# Altium PCB iForce-FPC.PcbDoc
Units mil, origin at the board's own origin, x right, y up, seen from the top; angles counter-clockwise.
Board outline 1062.99 x 661.42 mil, 2 copper layers (Top Layer, Bottom Layer); 1 components, 2 nets, 6 pads, 4 vias.
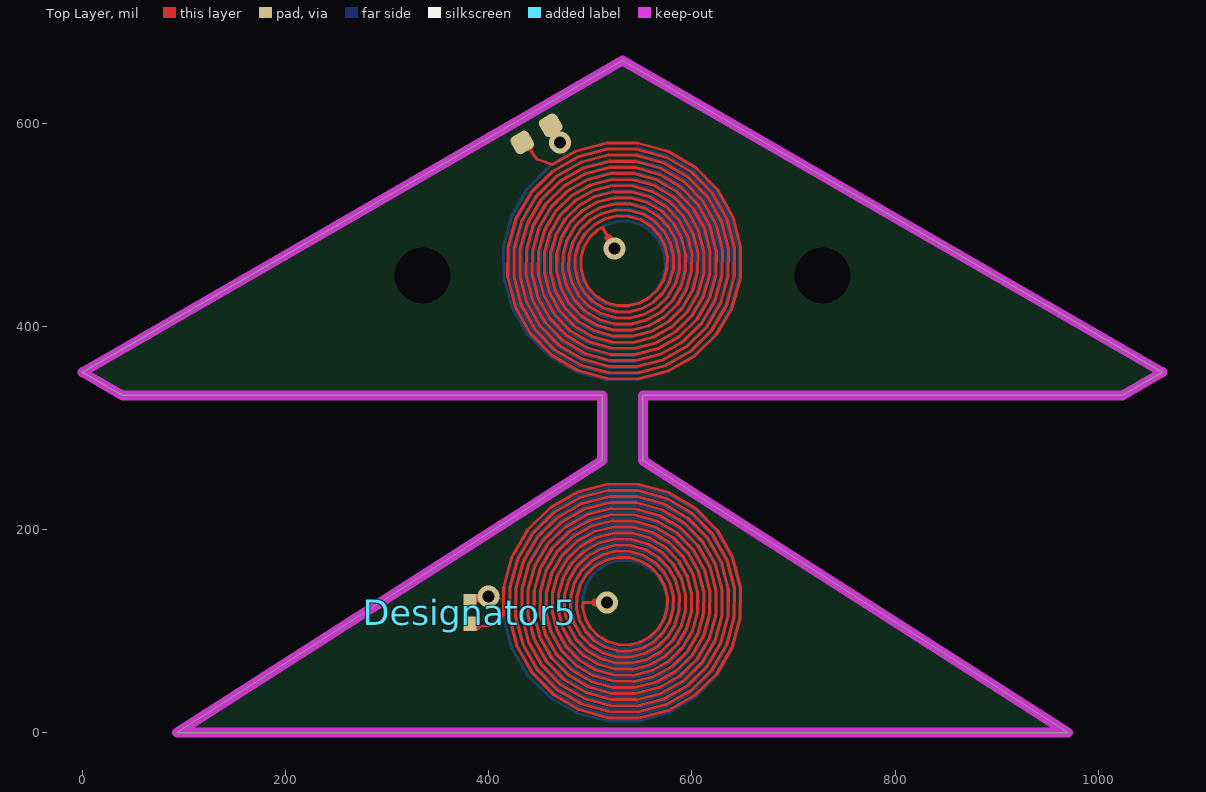
[diagram p0: Top Layer view]
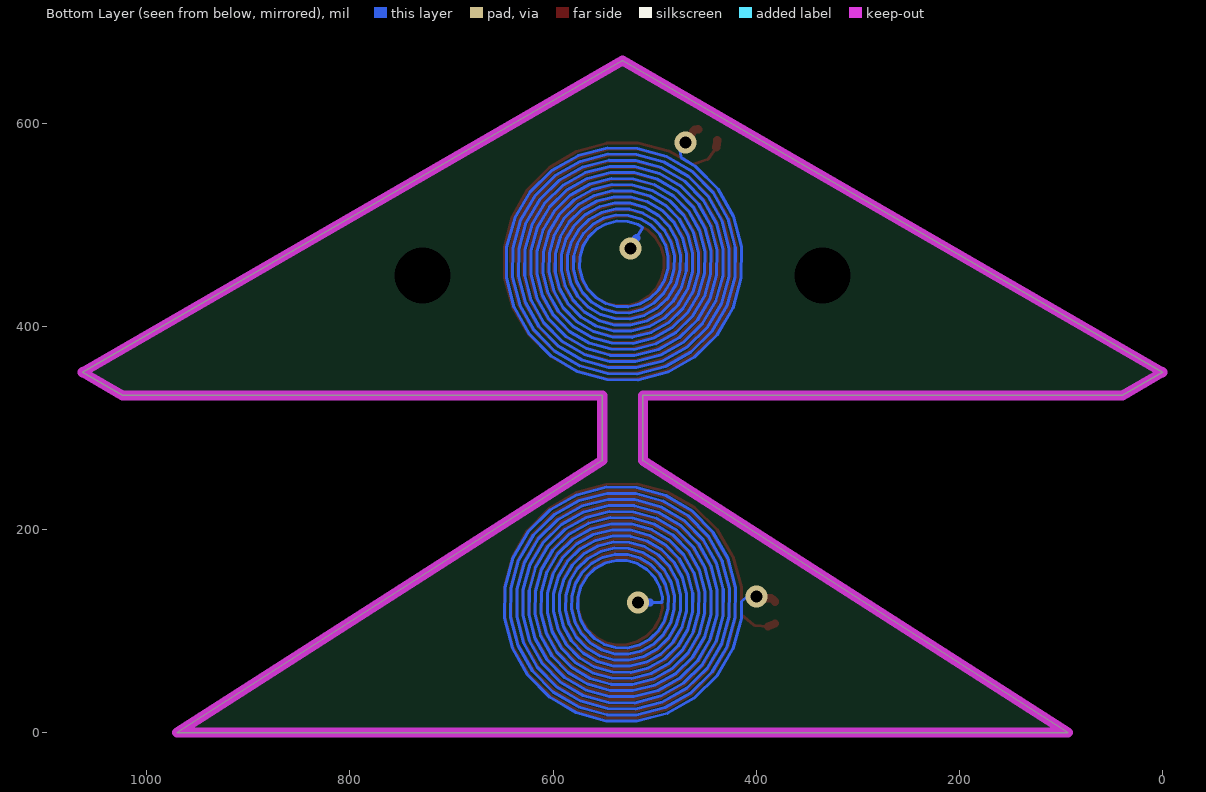
[diagram p1: Bottom Layer view, seen from below]

## Layer stack, top to bottom
Top Solder: solder mask 0.4, Solder Resist, Dk 3.5
Top Layer: signal copper 1.4
Dielectric 1: dielectric 12.6, FR-4, Dk 4.8
Bottom Layer: signal copper 1.4
Bottom Solder: solder mask 0.4, Solder Resist, Dk 3.5

## Board outline
93.44,0.25 511.75,267.97 511.75,332.08 39.62,332.08 0.25,354.81 531.75,661.67 1063.24,354.81 1023.87,332.08 551.74,332.08 551.74,267.97 970.05,0.25

## Design rules (kind name [scope] priority, off if disabled: settings)
Clearance [All] p1: gap=3 ignorepadtopadclearanceinfootprint=FALSE
PolygonConnect [All] p1: connectstyle=Relief reliefconductorwidth=10 reliefentries=4 polygonreliefangle="90 Angle" airgapwidth=10
RoutingVias [All] p1: holewidth=11.81 width=21.65 viastyle="Through Hole" minholewidth=11.81 minwidth=21.65 maxholewidth=28 maxwidth=50
SolderMaskExpansion [All] p1: expansion=4 istentingtop=FALSE
Width [All] p1: maxlimit=10 minlimit=3 preferedwidth=3
30 further rules are at their usual default settings.

## Components (designator, comment, footprint, x,y, rotation, side; value= is the part's Value field where it differs from the comment)
Designator5 "Comment" CAPC0603X33X15LL03T05 381.72,118.42 r90 top

## Footprints (in the part's own frame and the unit in brackets; to place one, negate y for a bottom-side part, rotate by r counter-clockwise, add the part's x,y. Pads: shape width x height; smd on the part's side, far side on the other; paste and mask are expansions set on the pad)
CAPC0603X33X15LL03T05 [mm] "Chip Capacitor, 2-Leads, Body 0.60x0.30mm, IPC High Density"
  rect 0.36x0.32 smd: 1(-0.28,0) 2(0.28,0)
  body extent -0.32,-0.17 0.32,0.17, height 0.33

## Free pads (board coordinates)
  rrect50% 19.68x19.68 smd rot 30: 1(433,581) 2(461,598)
  round 40 hole 55.12: NC(334.9,450.19) NC(728.6,450.19)

## Via types
v1: diameter 21.65, hole 11.81, Top Layer to Bottom Layer, tented both sides, 4 vias

## Nets (pads, with @x,y where several pads share a name; then routed paths per layer and width w, separated by ;. In a path a pad name is that pad's centre, name@x,y a point inside that pad or via, vN(x,y) a via of type N, cw(c..) or ccw(c..) an arc to the next point about the centre after c; other vN are vias at no path point)
L-1: pad.1 pad.2 | length 13111.8
  Top Layer w3: pad.1@439.51,576.17 446.81,565.36 447.48,564.69 448.1,564.46 462.44,559.18 472.83,565.18 486.39,572.73 516.4,580.51 547.33,580.26 577.08,572.03 603.63,556.41 625.18,534.5 640.3,507.82 647.98,478.19 647.73,447.66 639.6,418.29 624.18,392.08 602.55,370.81 576.21,355.89 546.97,348.31 516.83,348.56 487.84,356.59 461.98,371.81 440.98,393.16 426.26,419.16 418.78,448.02 419.03,477.77 426.96,506.37 441.98,531.89 463.05,552.61 488.71,567.13 517.19,574.51 546.54,574.26 574.76,566.44 599.94,551.61 620.38,530.82 634.71,505.5 641.98,477.4 641.73,448.45 634.01,420.61 619.38,395.77 598.87,375.61 573.89,361.48 546.18,354.31 517.62,354.56 490.16,362.18 465.66,376.61 445.78,396.84 431.85,421.48 424.78,448.81 425.03,476.98 432.55,504.05 446.78,528.21 466.74,547.81 491.03,561.54 517.98,568.51 545.75,568.26 572.45,560.84 596.26,546.81 615.58,527.13 629.12,503.19 635.98,476.61 635.73,449.24 628.42,422.92 614.58,399.45 595.18,380.41 571.58,367.07 545.39,360.31 518.41,360.56 492.47,367.77 469.35,381.41 450.58,400.53 437.44,423.79 430.78,449.6 431.03,476.19 438.14,501.74 451.58,524.52 470.42,543.01 493.34,555.95 518.77,562.51 544.96,562.26 570.13,555.25 592.57,542.01 610.78,523.45 623.53,500.87 629.98,475.82 629.73,450.03 622.83,425.24 609.78,403.14 591.5,385.21 569.26,372.66 544.6,366.31 519.2,366.56 494.79,373.36 473.03,386.21 455.38,404.21 443.03,426.11 436.78,450.39 437.03,475.4 443.73,499.42 456.38,520.84 474.1,538.21 495.66,550.36 519.56,556.51 544.17,556.26 567.81,549.66 588.89,537.21 605.98,519.77 617.93,498.55 623.98,475.03 623.73,450.82 617.24,427.55 604.98,406.82 587.82,390.01 566.95,378.25 543.81,372.31 519.99,372.56 497.1,378.95 476.71,391.01 460.19,407.9 448.62,428.42 442.78,451.18 443.03,474.61 449.32,497.11 461.19,517.16 477.79,533.4 497.97,544.77 520.35,550.51 543.38,550.26 565.5,544.07 585.21,532.4 601.18,516.08 612.34,496.24 617.98,474.24 617.73,451.61 611.64,429.87 600.18,410.51 584.13,394.81 564.63,383.84 543.02,378.31 520.78,378.56 499.42,384.54 480.4,395.82 464.99,411.58 454.21,430.74 448.78,451.97 449.03,473.82 454.91,494.79 465.99,513.47 481.47,528.6 500.29,539.18 521.14,544.51 542.59,544.26 563.18,538.48 581.52,527.6 596.37,512.4 606.75,493.92 611.98,473.45 611.73,452.4 606.05,432.19 595.37,414.19 580.45,399.62 562.31,389.44 542.23,384.31 521.57,384.56 501.74,390.13 484.08,400.62 469.79,415.26 459.8,433.05 454.78,452.76 455.03,473.03 460.5,492.47 470.79,509.79 485.16,523.8 502.6,533.59 521.93,538.51 541.8,538.26 560.87,532.89 577.84,522.8 591.57,508.71 601.16,491.61 605.98,472.66 605.73,453.19 600.46,434.5 590.57,417.87 576.76,404.42 560,395.03 541.44,390.31 522.36,390.56 504.05,395.73 487.77,405.42 474.59,418.95 465.4,435.37 460.78,453.55 461.03,472.24 466.09,490.16 475.59,506.1 488.84,519 504.92,528 522.72,532.51 541.01,532.26 558.55,527.3 574.15,518 586.77,505.03 595.57,489.29 599.98,471.87 599.73,453.98 594.87,436.82 585.77,421.56 573.08,409.22 557.68,400.62 540.65,396.31 523.15,396.56 506.37,401.32 491.45,410.22 479.39,422.63 470.99,437.69 466.78,454.34 467.03,471.45 471.69,487.84 480.39,502.42 492.52,514.2 507.24,522.41 523.51,526.51 540.22,526.26 556.24,521.71 570.47,513.2 581.97,501.35 589.98,486.97 593.98,471.08 593.73,454.77 589.28,439.13 580.97,425.24 569.39,414.02 555.37,406.21 539.86,402.31 523.94,402.56 508.68,406.91 495.13,415.02 484.19,426.32 476.58,440 472.78,455.13 473.03,470.66 477.28,485.53 485.19,498.74 496.21,509.4 509.55,516.81 524.3,520.51 539.43,520.26 553.92,516.12 566.79,508.4 577.17,497.66 584.39,484.66 587.98,470.29 587.73,455.56 583.69,441.45 576.17,428.93 565.71,418.82 553.05,411.8 539.07,408.31 524.73,408.56 511,412.5 498.82,419.82 488.99,430 482.17,442.32 478.78,455.92 479.03,469.87 482.87,483.21 489.99,495.05 499.89,504.6 511.87,511.22 525.09,514.51 538.64,514.26 551.6,510.52 563.1,503.6 572.37,493.98 578.8,482.34 581.98,469.5 581.73,456.35 578.1,443.77 571.37,432.61 562.03,423.62 550.73,417.39 538.28,414.31 525.52,414.56 513.32,418.09 502.5,424.62 493.79,433.68 487.76,444.63 484.78,456.71 485.03,469.08 488.46,480.9 494.79,491.37 503.58,499.8 514.18,505.63 525.88,508.51 537.85,508.26 549.29,504.93 559.42,498.8 567.57,490.29 573.21,480.03 575.98,468.71 575.73,457.14 572.51,446.08 566.57,436.29 558.34,428.42 548.42,422.98 537.49,420.31 526.31,420.56 515.63,423.68 506.19,429.42 498.59,437.37 493.35,446.95 490.78,457.5 491.03,468.29 494.05,478.58 499.59,487.68 507.26,495 511.96,497.42 517.89,487.13
  Top Layer w8: pad.1@438.45,583.32 pad.1@439.51,576.17 ; pad.2@456.86,593.95 457.55,594.34 460.69,593.5 461.08,592.82 461.97,592.58 467.49,583.03 469.52,581 v1(470,581) ; 517.89,487.13 v1(523.83,476.85)
  Bottom Layer w3: v1(470,581) 470,578.11 475.17,572.94 474.15,567.07 473.8,565.77 472.76,565.14 459.52,557.21 437.78,535.12 422.53,508.2 414.78,478.33 415.03,447.53 423.23,417.9 438.78,391.47 460.6,370.01 487.17,354.96 516.66,347.31 547.07,347.56 576.31,355.66 602.4,371.01 623.58,392.55 638.43,418.77 645.98,447.89 645.73,477.9 637.74,506.76 622.58,532.51 601.32,553.41 575.44,568.07 546.7,575.51 517.09,575.26 488.61,567.37 463.2,552.41 442.58,531.43 428.12,505.89 420.78,477.54 421.03,448.32 428.82,420.22 443.58,395.15 464.28,374.81 489.48,360.55 517.45,353.31 546.28,353.56 573.99,361.25 598.71,375.81 618.78,396.23 632.84,421.09 639.98,448.68 639.73,477.11 632.15,504.44 617.78,528.82 597.64,548.61 573.12,562.48 545.91,569.51 517.88,569.26 490.93,561.78 466.89,547.61 447.38,527.75 433.71,503.57 426.78,476.75 427.03,449.11 434.41,422.54 448.38,398.84 467.96,379.61 491.8,366.14 518.24,359.31 545.49,359.56 571.67,366.84 595.03,380.61 613.98,399.91 627.25,423.41 633.98,449.47 633.73,476.32 626.55,502.12 612.98,525.14 593.96,543.81 570.81,556.88 545.12,563.51 518.67,563.26 493.24,556.19 470.57,542.81 452.18,524.06 439.3,501.26 432.78,475.96 433.03,449.9 440,424.85 453.18,402.52 471.65,384.41 494.11,371.73 519.03,365.31 544.7,365.56 569.36,372.43 591.35,385.41 609.18,403.6 621.66,425.72 627.98,450.26 627.73,475.53 620.96,499.81 608.18,521.45 590.27,539.01 568.49,551.29 544.33,557.51 519.46,557.26 495.56,550.59 474.26,538.01 456.98,520.38 444.89,498.94 438.78,475.17 439.03,450.69 445.59,427.17 457.98,406.21 475.33,389.21 496.43,377.32 519.82,371.31 543.91,371.56 567.04,378.02 587.66,390.21 604.38,407.28 616.07,428.04 621.98,451.05 621.73,474.74 615.37,497.49 603.38,517.77 586.59,534.2 566.17,545.7 543.54,551.51 520.25,551.26 497.88,545 477.94,533.2 461.79,516.7 450.49,496.62 444.78,474.38 445.03,451.48 451.18,429.48 462.79,409.89 479.02,394.01 498.74,382.91 520.61,377.31 543.12,377.56 564.73,383.61 583.98,395.01 599.58,410.97 610.48,430.35 615.98,451.84 615.73,473.95 609.78,495.18 598.57,514.09 582.9,529.4 563.86,540.11 542.75,545.51 521.04,545.26 500.19,539.41 481.63,528.4 466.59,513.01 456.08,494.31 450.78,473.59 451.03,452.27 456.78,431.8 467.59,413.58 482.7,398.82 501.06,388.5 521.4,383.31 542.33,383.56 562.41,389.2 580.29,399.82 594.77,414.65 604.89,432.67 609.98,452.63 609.73,473.16 604.19,492.86 593.77,510.4 579.22,524.6 561.54,534.52 541.96,539.51 521.83,539.26 502.51,533.82 485.31,523.6 471.39,509.33 461.67,491.99 456.78,472.8 457.03,453.06 462.37,434.12 472.39,417.26 486.38,403.62 503.38,394.1 522.19,389.31 541.54,389.56 560.09,394.79 576.61,404.62 589.97,418.33 599.3,434.98 603.98,453.42 603.73,472.37 598.6,490.55 588.97,506.72 575.54,519.8 559.23,528.93 541.17,533.51 522.62,533.26 504.82,528.23 488.99,518.8 476.19,505.64 467.26,489.68 462.78,472.01 463.03,453.85 467.96,436.43 477.19,420.94 490.07,408.42 505.69,399.69 522.98,395.31 540.75,395.56 557.78,400.39 572.93,409.42 585.17,422.02 593.71,437.3 597.98,454.21 597.73,471.58 593.01,488.23 584.17,503.03 571.85,515 556.91,523.34 540.38,527.51 523.41,527.26 507.14,522.64 492.68,514 480.99,501.96 472.85,487.36 468.78,471.22 469.03,454.64 473.55,438.75 481.99,424.63 493.75,413.22 508.01,405.28 523.77,401.31 539.96,401.56 555.46,405.98 569.24,414.22 580.37,425.7 588.12,439.62 591.98,455 591.73,470.79 587.42,485.91 579.37,499.35 568.17,510.2 554.59,517.75 539.6,521.51 524.2,521.26 509.46,517.05 496.36,509.2 485.79,498.27 478.44,485.04 474.78,470.43 475.03,455.43 479.14,441.06 486.79,428.31 497.44,418.02 510.32,410.87 524.56,407.31 539.17,407.56 553.15,411.57 565.56,419.02 575.57,429.39 582.52,441.93 585.98,455.79 585.73,470 581.83,483.6 574.57,495.67 564.48,505.4 552.28,512.16 538.81,515.51 524.99,515.26 511.77,511.46 500.05,504.4 490.59,494.59 484.03,482.73 480.78,469.64 481.03,456.22 484.73,443.38 491.59,432 501.12,422.82 512.64,416.46 525.35,413.31 538.38,413.56 550.83,417.16 561.87,423.82 570.77,433.07 576.93,444.25 579.98,456.58 579.73,469.21 576.23,481.28 569.77,491.98 560.8,500.6 549.96,506.56 538.02,509.51 525.78,509.26 514.09,505.87 503.73,499.6 495.39,490.91 489.62,480.41 486.78,468.85 487.03,457.01 490.32,445.7 496.39,435.68 504.8,427.62 514.96,422.05 526.14,419.31 537.59,419.56 548.52,422.75 558.19,428.62 565.97,436.75 571.34,446.56 573.98,457.37 573.73,468.42 570.64,478.97 564.97,488.3 557.11,495.8 547.65,500.97 537.23,503.51 526.57,503.26 516.4,500.27 511.96,497.42 517.89,487.13
  Bottom Layer w8: 517.89,487.13 v1(523.83,476.85)
L-2: Designator5.1 Designator5.2 | length 13116.6
  Top Layer w3: 388.44,104.73 401.45,105.65 402.37,105.9 402.88,106.32 414.61,116.1 414.61,128.1 414.86,143.61 423.12,173.49 438.81,200.15 460.81,221.8 487.61,236.98 517.36,244.7 548.03,244.45 577.52,236.28 603.84,220.8 625.21,199.08 640.19,172.62 647.8,143.25 647.55,112.98 639.5,83.87 624.21,57.89 602.76,36.8 576.65,22.01 547.66,14.5 517.79,14.75 489.05,22.71 463.42,37.8 442.61,58.96 428.02,84.74 420.61,113.34 420.86,142.82 428.72,171.17 443.61,196.47 464.49,217 489.92,231.39 518.15,238.7 547.24,238.45 575.2,230.69 600.16,216 620.41,195.39 634.6,170.31 641.8,142.46 641.55,113.77 633.9,86.18 619.41,61.57 599.08,41.6 574.34,27.6 546.87,20.5 518.58,20.75 491.37,28.3 467.1,42.6 447.41,62.65 433.61,87.05 426.61,114.13 426.86,142.03 434.31,168.86 448.41,192.78 468.18,212.2 492.24,225.8 518.94,232.7 546.45,232.45 572.89,225.1 596.47,211.2 615.61,191.71 629.01,167.99 635.8,141.67 635.55,114.56 628.31,88.5 614.61,65.26 595.4,46.4 572.02,33.19 546.08,26.5 519.37,26.75 493.69,33.89 470.79,47.4 452.21,66.33 439.2,89.37 432.61,114.92 432.86,141.24 439.9,166.54 453.21,189.1 471.86,207.4 494.55,220.21 519.73,226.7 545.66,226.45 570.57,219.51 592.79,206.4 610.8,188.03 623.42,165.67 629.8,140.88 629.55,115.35 622.72,90.81 609.8,68.94 591.71,51.2 569.7,38.78 545.29,32.5 520.16,32.75 496,39.48 474.47,52.2 457.01,70.02 444.79,91.68 438.61,115.71 438.86,140.45 445.49,164.23 458.01,185.42 475.54,202.6 496.87,214.62 520.52,220.7 544.87,220.45 568.26,213.92 589.1,201.6 606,184.34 617.83,163.36 623.8,140.09 623.55,116.14 617.13,93.13 605,72.62 588.03,56 567.39,44.38 544.5,38.5 520.95,38.75 498.32,45.07 478.15,57 461.81,73.7 450.38,94 444.61,116.5 444.86,139.66 451.08,161.91 462.81,181.73 479.23,197.79 499.19,209.03 521.31,214.7 544.08,214.45 565.94,208.33 585.42,196.79 601.2,180.66 612.24,161.04 617.8,139.3 617.55,116.93 611.54,95.45 600.2,76.31 584.34,60.8 565.07,49.97 543.71,44.5 521.73,44.75 500.63,50.67 481.84,61.81 466.61,77.38 455.97,96.31 450.61,117.29 450.86,138.87 456.67,159.59 467.61,178.05 482.91,192.99 501.5,203.44 522.1,208.7 543.29,208.45 563.62,202.74 581.74,191.99 596.4,176.97 606.65,158.73 611.8,138.51 611.55,117.72 605.95,97.76 595.4,79.99 580.66,65.61 562.76,55.56 542.92,50.5 522.52,50.75 502.95,56.26 485.52,66.61 471.41,81.07 461.56,98.63 456.61,118.08 456.86,138.08 462.26,157.28 472.42,174.36 486.6,188.19 503.82,197.85 522.89,202.7 542.5,202.45 561.31,197.15 578.05,187.19 591.6,173.29 601.06,156.41 605.8,137.72 605.55,118.51 600.36,100.08 590.6,83.68 576.98,70.41 560.44,61.15 542.13,56.5 523.31,56.75 505.27,61.85 489.21,71.41 476.22,84.75 467.15,100.95 462.61,118.87 462.86,137.29 467.85,154.96 477.22,170.68 490.28,183.39 506.13,192.25 523.68,196.7 541.71,196.45 558.99,191.56 574.37,182.39 586.8,169.6 595.47,154.09 599.8,136.93 599.55,119.3 594.77,102.39 585.8,87.36 573.29,75.21 558.12,66.74 541.34,62.5 524.1,62.75 507.58,67.44 492.89,76.21 481.02,88.44 472.75,103.26 468.61,119.66 468.86,136.51 473.44,152.65 482.02,167 493.97,178.59 508.45,186.66 524.47,190.7 540.92,190.45 556.68,185.96 570.68,177.59 582,165.92 589.87,151.78 593.8,136.14 593.55,120.09 589.18,104.71 581,91.05 569.61,80.01 555.81,72.33 540.55,68.5 524.89,68.75 509.9,73.03 496.57,81.01 485.82,92.12 478.34,105.58 474.61,120.45 474.86,135.72 479.04,150.33 486.82,163.31 497.65,173.79 510.77,181.07 525.26,184.7 540.13,184.45 554.36,180.37 567,172.79 577.2,162.24 584.28,149.46 587.8,135.35 587.55,120.88 583.58,107.03 576.2,94.73 565.92,84.81 553.49,77.92 539.76,74.5 525.68,74.75 512.21,78.62 500.26,85.81 490.62,95.8 483.93,107.89 480.61,121.24 480.86,134.93 484.63,148.02 491.62,159.63 501.33,168.99 513.08,175.48 526.05,178.7 539.34,178.45 552.04,174.78 563.31,167.99 572.4,158.55 578.69,147.15 581.8,134.56 581.55,121.67 577.99,109.34 571.39,98.41 562.24,89.61 551.18,83.51 538.97,80.5 526.47,80.75 514.53,84.21 503.94,90.61 495.42,99.49 489.52,110.21 486.61,122.03 486.86,134.14 490.22,145.7 496.42,155.94 505.02,164.19 515.4,169.89 526.84,172.7 538.55,172.45 549.73,169.19 559.63,163.19 567.59,154.87 573.1,144.83 575.8,133.77 575.55,122.46 572.4,111.66 566.59,102.1 558.56,94.41 548.86,89.1 538.18,86.5 527.26,86.75 516.84,89.8 507.63,95.41 500.22,103.17 495.11,112.53 492.61,122.82 492.86,128.1 504.74,128.1
  Top Layer w8: Designator5.1 388.44,104.73 ; Designator5.2@381.72,128.65 Designator5.2 384.02,131.74 384.81,131.74 385.46,132.39 396.48,132.39 v1@398.72,134.63 ; 504.74,128.1 v1(516.61,128.1)
  Bottom Layer w3: v1@394,134.38 394.39,134 398.72,134 409.06,134 413.64,130.19 414.59,129.23 414.61,128.02 414.86,112.58 423.12,82.71 438.81,56.05 460.81,34.4 487.61,19.22 517.36,11.5 548.03,11.75 577.52,19.91 603.84,35.4 625.21,57.12 640.19,83.58 647.8,112.95 647.55,143.22 639.5,172.33 624.21,198.31 602.76,219.4 576.65,234.19 547.66,241.7 517.79,241.45 489.05,233.49 463.42,218.4 442.61,197.24 428.02,171.46 420.61,142.86 420.86,113.37 428.72,85.02 443.61,59.73 464.49,39.2 489.92,24.81 518.15,17.5 547.24,17.75 575.2,25.51 600.16,40.2 620.41,60.81 634.6,85.89 641.8,113.74 641.55,142.43 633.9,170.02 619.41,194.63 599.08,214.6 574.34,228.6 546.87,235.7 518.58,235.45 491.37,227.9 467.1,213.6 447.41,193.55 433.61,169.15 426.61,142.07 426.86,114.16 434.31,87.34 448.41,63.41 468.18,44 492.24,30.4 518.94,23.5 546.45,23.75 572.89,31.1 596.47,45 615.61,64.49 629.01,88.21 635.8,114.53 635.55,141.64 628.31,167.7 614.61,190.94 595.4,209.8 572.02,223.01 546.08,229.7 519.37,229.45 493.69,222.31 470.79,208.8 452.21,189.87 439.2,166.83 432.61,141.28 432.86,114.95 439.9,89.66 453.21,67.1 471.86,48.8 494.55,35.99 519.73,29.5 545.66,29.75 570.57,36.69 592.79,49.8 610.8,68.17 623.42,90.52 629.8,115.32 629.55,140.85 622.72,165.38 609.8,187.26 591.71,205 569.7,217.41 545.29,223.7 520.16,223.45 496,216.72 474.47,204 457.01,186.18 444.79,164.52 438.61,140.49 438.86,115.74 445.49,91.97 458.01,70.78 475.54,53.6 496.87,41.58 520.52,35.5 544.87,35.75 568.26,42.28 589.1,54.6 606,71.86 617.83,92.84 623.8,116.11 623.55,140.06 617.13,163.07 605,183.57 588.03,200.19 567.39,211.82 544.5,217.7 520.95,217.45 498.32,211.12 478.15,199.19 461.81,182.5 450.38,162.2 444.61,139.7 444.86,116.53 451.08,94.29 462.81,74.47 479.23,58.4 499.19,47.17 521.31,41.5 544.08,41.75 565.94,47.87 585.42,59.4 601.2,75.54 612.24,95.16 617.8,116.9 617.55,139.27 611.54,160.75 600.2,179.89 584.34,195.39 565.07,206.23 543.71,211.7 521.73,211.45 500.63,205.53 481.84,194.39 466.61,178.82 455.97,159.88 450.61,138.91 450.86,117.32 456.67,96.6 467.61,78.15 482.91,63.21 501.5,52.76 522.1,47.5 543.29,47.75 563.62,53.46 581.74,64.21 596.4,79.23 606.65,97.47 611.8,117.69 611.55,138.48 605.95,158.44 595.4,176.21 580.66,190.59 562.76,200.64 542.92,205.7 522.52,205.45 502.95,199.94 485.52,189.59 471.41,175.13 461.56,157.57 456.61,138.12 456.86,118.11 462.26,98.92 472.42,81.84 486.6,68.01 503.82,58.35 522.89,53.5 542.5,53.75 561.31,59.05 578.05,69.01 591.6,82.91 601.06,99.79 605.8,118.48 605.55,137.69 600.36,156.12 590.6,172.52 576.98,185.79 560.44,195.05 542.13,199.7 523.31,199.45 505.27,194.35 489.21,184.79 476.22,171.45 467.15,155.25 462.61,137.33 462.86,118.9 467.85,101.24 477.22,85.52 490.28,72.81 506.13,63.94 523.68,59.5 541.71,59.75 558.99,64.64 574.37,73.81 586.8,86.59 595.47,102.1 599.8,119.27 599.55,136.9 594.77,153.8 585.8,168.84 573.29,180.99 558.12,189.46 541.34,193.7 524.1,193.45 507.58,188.76 492.89,179.99 481.02,167.76 472.75,152.94 468.61,136.54 468.86,119.69 473.44,103.55 482.02,89.2 493.97,77.61 508.45,69.54 524.47,65.5 540.92,65.75 556.68,70.23 570.68,78.61 582,90.28 589.87,104.42 593.8,120.06 593.55,136.11 589.18,151.49 581,165.15 569.61,176.19 555.81,183.87 540.55,187.7 524.89,187.45 509.9,183.17 496.57,175.19 485.82,164.08 478.34,150.62 474.61,135.75 474.86,120.48 479.04,105.87 486.82,92.89 497.65,82.41 510.77,75.13 525.26,71.5 540.13,71.75 554.36,75.83 567,83.41 577.2,93.96 584.28,106.74 587.8,120.85 587.55,135.32 583.58,149.17 576.2,161.47 565.92,171.39 553.49,178.28 539.76,181.7 525.68,181.45 512.21,177.58 500.26,170.39 490.62,160.39 483.93,148.3 480.61,134.96 480.86,121.27 484.63,108.18 491.62,96.57 501.33,87.21 513.08,80.72 526.05,77.5 539.34,77.75 552.04,81.42 563.31,88.21 572.4,97.65 578.69,109.05 581.8,121.64 581.55,134.53 577.99,146.86 571.39,157.79 562.24,166.59 551.18,172.69 538.97,175.7 526.47,175.45 514.53,171.99 503.94,165.59 495.42,156.71 489.52,145.99 486.61,134.17 486.86,122.06 490.22,110.5 496.42,100.26 505.02,92.01 515.4,86.31 526.84,83.5 538.55,83.75 549.73,87.01 559.63,93.01 567.59,101.33 573.1,111.37 575.8,122.43 575.55,133.74 572.4,144.54 566.59,154.1 558.56,161.79 548.86,167.09 538.18,169.7 527.26,169.45 516.84,166.4 507.63,160.79 500.22,153.03 495.11,143.67 492.61,133.38 492.86,128.1 504.74,128.1
  Bottom Layer w8: 504.74,128.1 v1(516.61,128.1)
  other v1: 400,134

## Keep-outs
Keep-Out Layer:
  the board outline again, w10

## Silkscreen, mask and mechanical layers (free items; w line width, h text height)
Mechanical 1:
  circle w0.5: c728.6,450.19 r19.68
  circle w0.5: c334.9,450.19 r19.68
  lines w0.5: 0.25,354.81 531.75,661.67 1063.24,354.81 1023.87,332.08 551.74,332.08 551.74,267.97 970.05,0.25 93.44,0.25 511.75,267.97 511.75,332.08 39.62,332.08 0.25,354.81
  text "补强说明： / 1.补强：3M背胶补强 / 2.补强区域：（文字说明所在层）Mechanical1层所示板块区域" at 723,593 h60